# EAGLE board PCB_L293D (EAGLE 9.7.0)
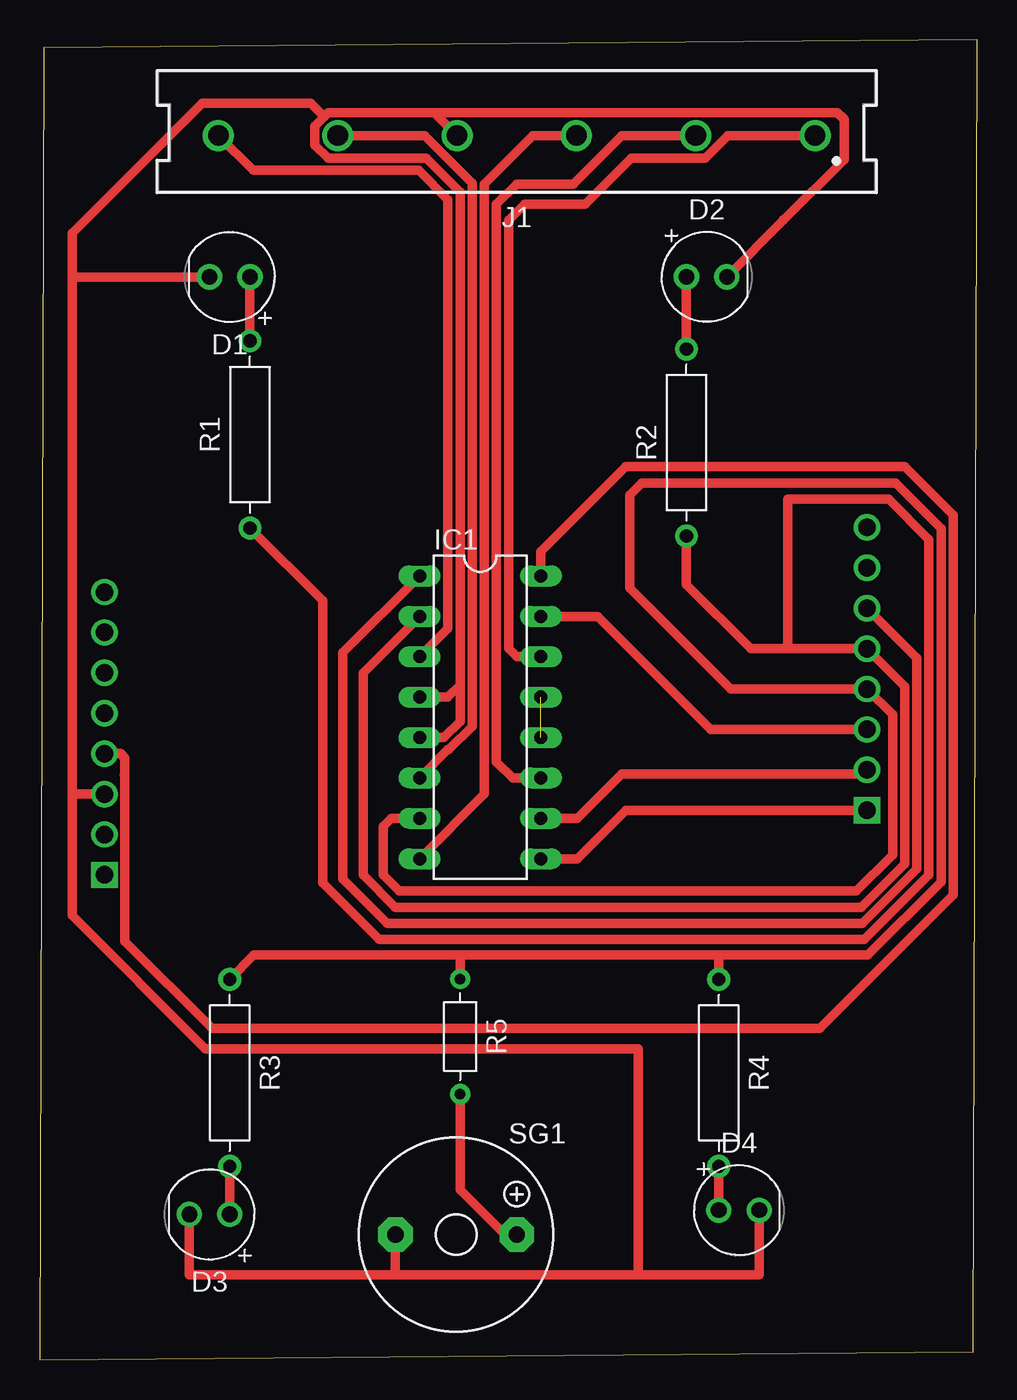
[diagram p0: board, top side]
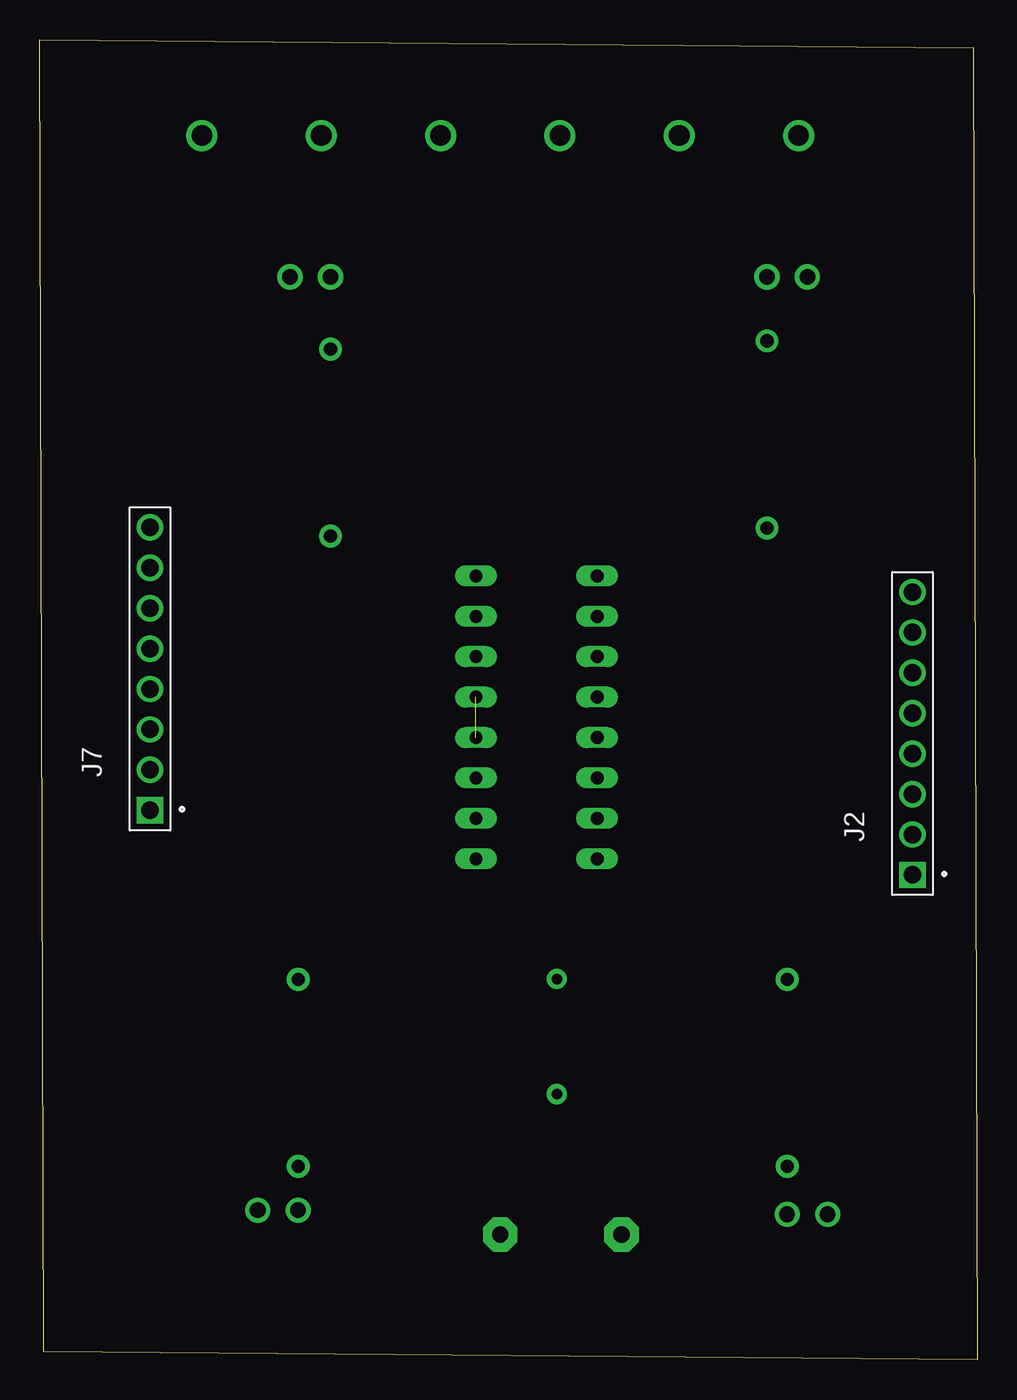
[diagram p1: board, bottom side, seen from below]

Size 58.91 x 82.98 mm. Coordinates in mm from the lower left corner, seen from the top.
Outline: 0,0 58.65,0.51 58.91,82.98 0.25,82.47 0,0
Copper layers (1*16): Top 0.035mm / dielectric 1.5mm / Bottom 0.035mm
Design rules "default": minimum track width 6mil, minimum drill 0.35mm, track to track 6mil, track to pad 6mil, pad to pad 6mil, via to via 6mil, smd to smd 6mil, copper to edge 40mil, drill to drill 6mil, minimum pad ring 10mil, minimum via ring 8mil, stop-mask expansion 4mil, vias tented up to drill 0mil, thermal gap 10mil

## Footprints (pad centres in the part's own frame; a part is rotated, then mirrored left to right if it is on the bottom)
LEDRD254W60D565H860B_B = drill 0.981 pad 1.581: 1 -1.27,0; 2 1.27,0
LEDRD254W60D565H860B = drill 0.981 pad 1.581: 1 -1.27,0; 2 1.27,0
DIL16 = drill 0.813 long: 1 -8.89,-3.81; 2 -6.35,-3.81; 3 -3.81,-3.81; 4 -1.27,-3.81; 5 1.27,-3.81; 6 3.81,-3.81; 7 6.35,-3.81; 8 8.89,-3.81; 9 8.89,3.81; 10 6.35,3.81; 11 3.81,3.81; 12 1.27,3.81; 13 -1.27,3.81; 14 -3.81,3.81; 15 -6.35,3.81; 16 -8.89,3.81
691137910006 = drill 1.3: 1 -18.75,0; 2 -11.25,0; 3 -3.75,0; 4 3.75,0; 5 11.25,0; 6 18.75,0
61300811121 = drill 1.1 square: 1 -8.89,0 | drill 1.1: 2 -6.35,0; 3 -3.81,0; 4 -1.27,0; 5 1.27,0; 6 3.81,0; 7 6.35,0; 8 8.89,0
RESAD1176W63L850D250B = drill 0.83 pad 1.43: 1 -5.88,0; 2 5.88,0
RESAD724W46L381D178B = drill 0.66 pad 1.26: 1 -3.62,0; 2 3.62,0
F/TMB = drill 1.016 pad 2.159 octagon: + 3.81,0; - -3.81,0

## Placement (x,y rotation side)
D1  LED_BLUE  [LEDRD254W60D565H860B_B]  11.94,68.07 180 top
D2  LED_BLUE  [LEDRD254W60D565H860B_B]  41.91,68.07 0 top
D3  LED_RED  [LEDRD254W60D565H860B]  10.67,9.14 180 top
D4  LED_RED  [LEDRD254W60D565H860B]  43.94,9.4 0 top
IC1  L293D  [DIL16]  27.69,40.39 270 top
J1  691137910006  [691137910006]  29.97,76.96 180 top
J2  61300811121  [61300811121]  4.06,39.37 90 bottom
J7  61300811121  [61300811121]  51.98,43.43 90 bottom
R1  [RESAD1176W63L850D250B]  13.21,58.17 90 top
R2  [RESAD1176W63L850D250B]  40.64,57.66 90 top
R3  [RESAD1176W63L850D250B]  11.94,18.03 270 top
R4  [RESAD1176W63L850D250B]  42.67,18.03 270 top
R5  [RESAD724W46L381D178B]  26.42,20.32 270 top
SG1  F/TMB  [F/TMB]  26.16,7.87 0 top

## Library data of the parts
D1-D4 = Opto-Electronic; CATEGORY: Opto-Electronic; SUB-CATEGORY: LED
IC1 = st-microelectronics; MPN: L293D; OC_FARNELL: 9589619; OC_NEWARK: 56P8249
J1 = Wurth_Connectors_WR-TBL Wire Protector; DATASHEET-URL: https://www.we-online.com/catalog/datasheet/691137910006.pdf; IR-UL: 16A; IR-VDE: 24A; MOUNT: THT; PART-NUMBER: 691137910006; PINS: 6; PITCH: 7.5mm; TYPE: Horizontal; WIRE: 30 to 12 (AWG) 0.05 to 3.31 (mm²); WORKING-VOLTAGE-UL: 300V(AC); WORKING-VOLTAGE-VDE: 750V(AC)
J2 J7 = Headers; CREATED_BY: PCBLayout.com; DIGI_KEY_PART_NUMBER: 732-5321-ND; MANUFACTURER: Wurth Electronics Inc.; MPN: 61300811121
R1-R5 = Resistor; CATEGORY: Resistor; SUB-CATEGORY: Fixed
SG1 = buzzer; OC_FARNELL: unknown; OC_NEWARK: unknown

## Nets
N$1: IC1.2 J7.5 R1.1 R2.1
N$2: IC1.3 J1.6
N$3: IC1.14 J1.1
N$4: IC1.11 J1.2
N$5: IC1.16 J2.4
N$6: IC1.12 IC1.13
N$8: IC1.6 J1.5
N$9: D1.1 R1.2
N$10: D2.1 R2.2
N$11: IC1.15 J7.3
N$12: IC1.10 J7.2
N$13: D3.1 R3.2
N$14: D4.1 R4.2
N$16: IC1.9 J7.1
N$17: IC1.1 J7.6
N$18: D1.2 D2.2 D3.2 D4.2 IC1.4 IC1.5 J1.4 J2.3 SG1.-
N$19: IC1.8 J1.3
N$20: IC1.7 J7.4 R3.1 R4.1 R5.1
N$21: R5.2 SG1.+

## Tracks (layer width: path | path; a pad name or v marks a point on that pad's centre or on a via)
N$1
  Top 0.61: IC1.2 20.32,43.18 20.32,30.48 22.35,28.45 51.62,28.45 54.36,31.18 54.36,42.33 J7.5 46.99,44.7 | 46.99,44.7 44.67,44.7 40.64,48.73 R2.1 | 46.99,44.7 46.99,54.1 53.34,54.1 55.88,51.56 55.88,30.48 51.82,26.42 21.34,26.42 17.78,29.97 17.78,47.71 R1.1
N$2
  Top 0.61: J1.6 13.42,74.77 23.83,74.77 25.65,72.94 25.65,45.97 IC1.3
N$3
  Top 0.61: 31.5,44.5 IC1.14 29.97,44.2 29.46,44.7 29.46,71.63 30.48,72.64 34.29,72.64 37.18,75.53 41.81,75.53 43.25,76.96 J1.1
N$4
  Top 0.61: J1.2 36.58,76.96 33.53,73.91 29.97,73.91 28.7,72.64 28.7,37.59 29.72,36.58 IC1.11
N$5
  Top 0.61: IC1.16 31.5,50.8 36.83,56.13 54.36,56.13 57.4,53.09 57.4,29.21 49.02,20.83 10.83,20.83 5.35,26.31 5.35,36.32 5.35,36.75 | 5.32,36.75 5.35,36.75 | 5.35,36.75 5.35,36.82 5.35,37.83 5.08,38.1 J2.4
N$6  (1 unrouted)
N$8
  Top 0.61: J1.5 24.2,76.96 27.18,73.98 27.18,39.82 25.72,38.35 25.65,38.35 IC1.6
N$9
  Top 0.61: D1.1 R1.2
N$10
  Top 0.61: D2.1 R2.2
N$11
  Top 0.61: IC1.15 35.05,46.74 42.16,39.62 J7.3
N$12
  Top 0.61: IC1.10 33.78,34.04 36.58,36.83 51.73,36.83 J7.2
N$13
  Top 0.61: D3.1 R3.2
N$14
  Top 0.61: D4.1 R4.2
N$16
  Top 0.61: J7.1 36.83,34.54 33.78,31.5 IC1.9
N$17
  Top 0.61: IC1.1 19.05,44.45 19.05,30.23 21.84,27.43 51.68,27.43 55.12,30.87 55.12,44.11 J7.6
N$18
  Top 0.61: 2.03,68.07 2.03,35.56 | 2.03,35.56 2.03,35.31 | 37.6,5.33 45.21,5.33 D4.2 | 22.35,5.33 9.4,5.33 D3.2 | 22.35,5.33 37.6,5.33 | 2.03,35.31 2.03,27.94 10.41,19.56 37.6,19.56 37.6,5.33 | D1.2 2.03,68.07 | 46.74,71.63 D2.2 | 2.03,68.07 2.03,70.81 10.21,78.99 17.02,78.99 17.87,78.14 | 46.74,71.68 46.74,71.63 | SG1.- 22.35,5.33 | J1.4 24.79,78.39 | 24.79,78.39 18.13,78.39 17.87,78.14 | 26.42,42.42 26.42,73.41 24.29,75.53 18.13,75.53 17.29,76.37 17.29,77.56 17.87,78.14 | 26.42,42.42 25.65,41.66 IC1.4 | 26.42,42.42 26.42,40.13 25.4,39.12 IC1.5 | 46.74,71.63 50.55,75.44 50.55,77.98 50.13,78.39 24.79,78.39 | 2.29,35.56 2.03,35.31 | 2.03,35.56 2.29,35.56 | 2.29,35.56 J2.3
N$19
  Top 0.61: J1.3 30.99,76.96 27.94,73.91 27.94,35.56 IC1.8
N$20
  Top 0.61: IC1.7 22.1,34.04 21.59,33.53 21.59,30.48 22.61,29.46 51.31,29.46 53.59,31.75 53.59,40.55 J7.4 43.43,42.16 37.08,48.51 37.08,54.36 37.85,55.12 53.78,55.12 56.64,52.25 56.64,30.04 52.04,25.44 42.67,25.44 | 42.67,25.44 26.42,25.44 | 26.42,25.44 13.46,25.44 R3.1 | R4.1 42.67,25.44 | R5.1 26.42,25.44
N$21
  Top 0.61: R5.2 26.42,10.67 29.21,7.87 SG1.+